# EAGLE board Erika-PCB (EAGLE 9.6.2)
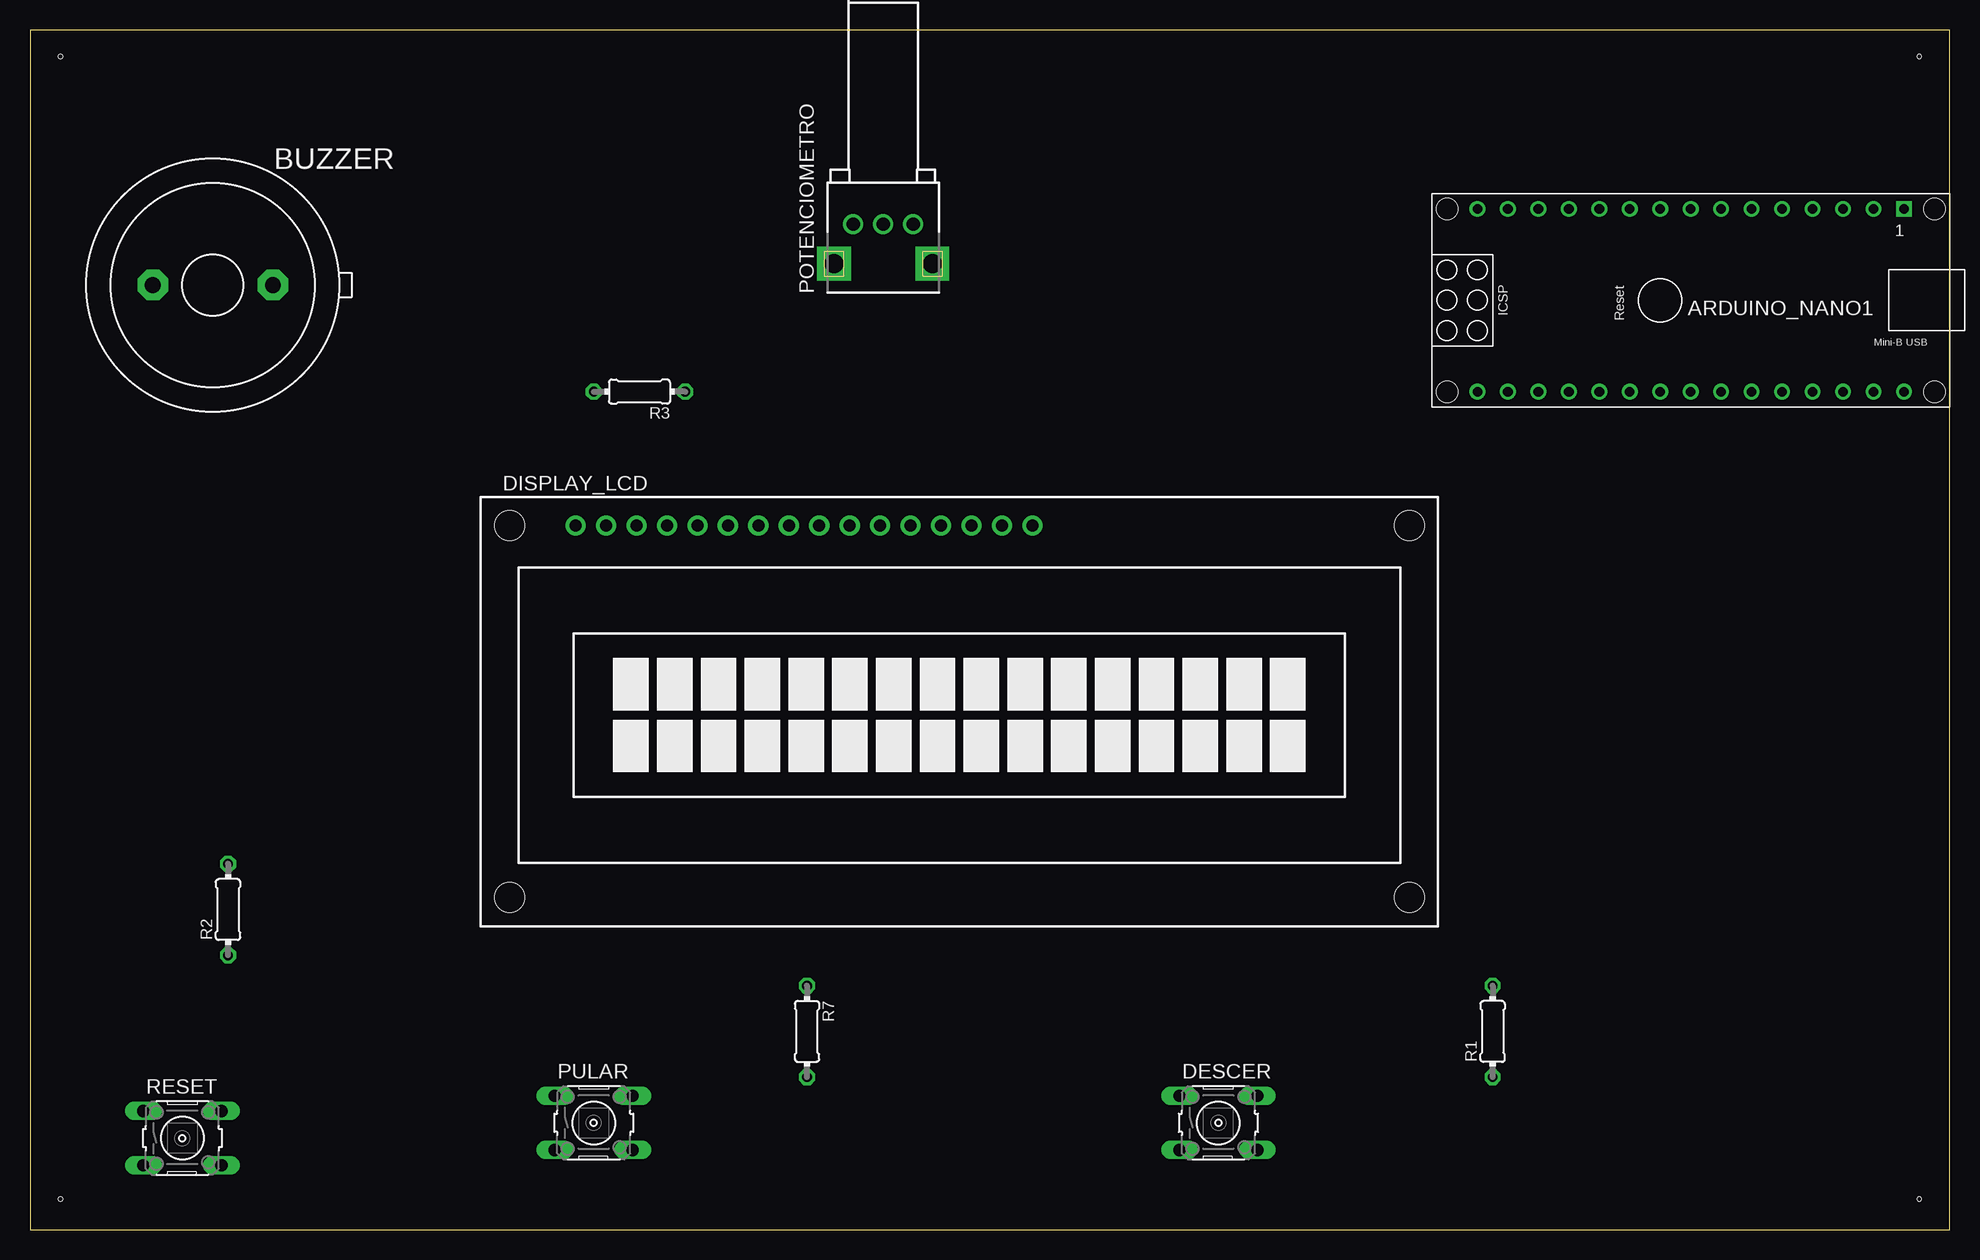
[diagram p0: board, top side]
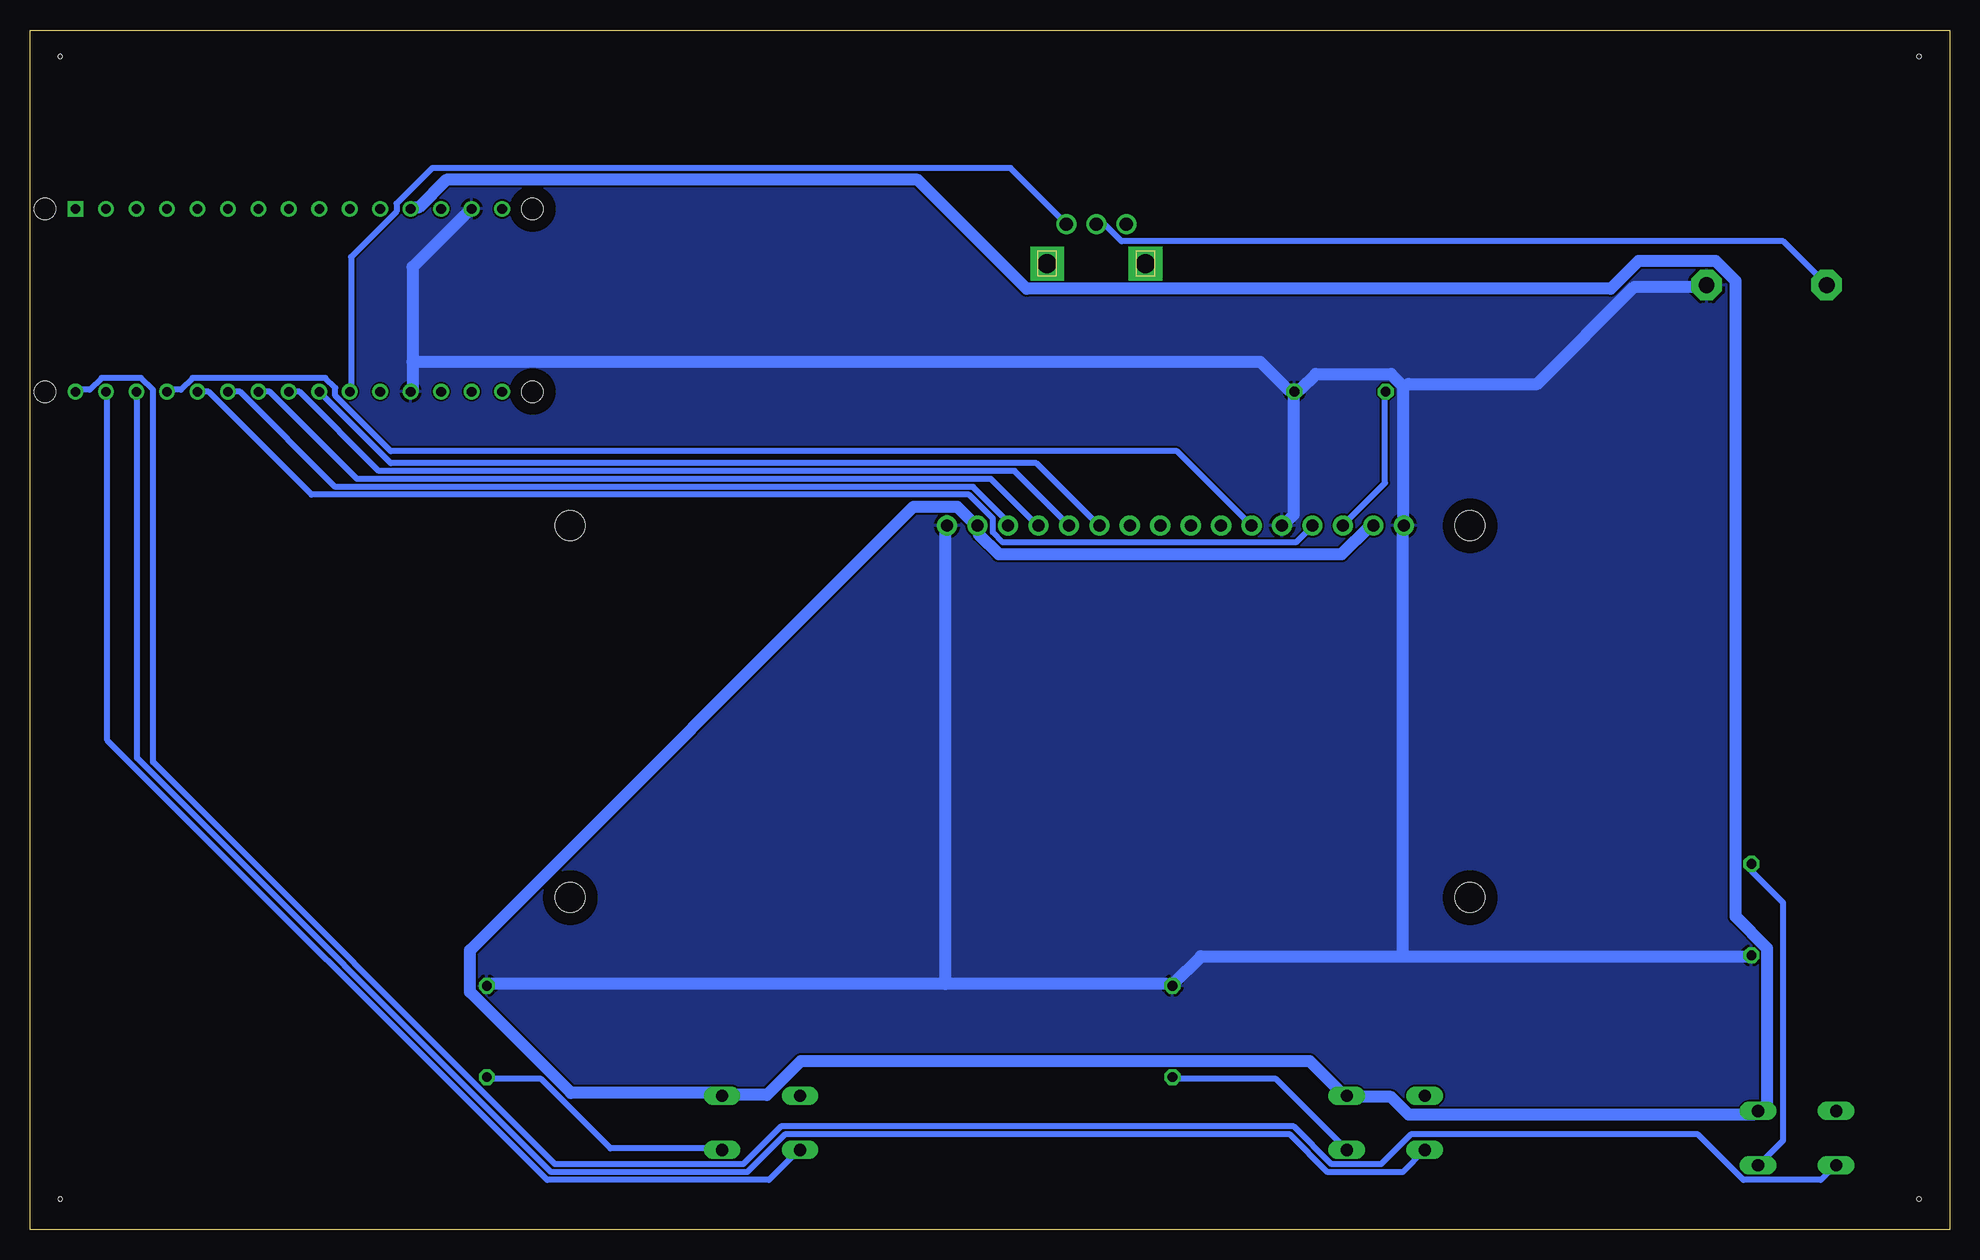
[diagram p1: board, bottom side, seen from below]

Size 160 x 100 mm. Coordinates in mm from the lower left corner, seen from the top.
Outline: 0,0 160,0 160,100 0,100 0,0
Copper layers (1*16): Top 0.035mm / dielectric 1.5mm / Bottom 0.035mm
Design rules "default": minimum track width 6mil, minimum drill 0.35mm, track to track 6mil, track to pad 6mil, pad to pad 6mil, via to via 6mil, smd to smd 6mil, copper to edge 40mil, drill to drill 6mil, minimum pad ring 10mil, minimum via ring 8mil, stop-mask expansion 4mil, vias tented up to drill 0mil, thermal gap 10mil
Net classes: 0 default: width 0.508 mm; 1 alimentação: width 1.016 mm
Holes 0.35 mm at 2.54,97.79 2.54,2.54 157.48,2.54 157.48,97.79

## Footprints (pad centres in the part's own frame; a part is rotated, then mirrored left to right if it is on the bottom)
ARDUINO_NANO = drill 0.8 square: 1 -20.32,-7.62 | drill 0.8: 2 -17.78,-7.62; 3 -15.24,-7.62; 4 -12.7,-7.62; 5 -10.16,-7.62; 6 -7.62,-7.62; 7 -5.08,-7.62; 8 -2.54,-7.62; 9 0,-7.62; 10 2.54,-7.62; 11 5.08,-7.62; 12 7.62,-7.62; 13 10.16,-7.62; 14 12.7,-7.62; 15 15.24,-7.62; 16 15.24,7.62; 17 12.7,7.62; 18 10.16,7.62; 19 7.62,7.62; 20 5.08,7.62; 21 2.54,7.62; 22 0,7.62; 23 -2.54,7.62; 24 -5.08,7.62; 25 -7.62,7.62; 26 -10.16,7.62; 27 -12.7,7.62; 28 -15.24,7.62; 29 -17.78,7.62; 30 -20.32,7.62 | hole 1.778: -22.86,-7.62; -22.86,7.62; 17.78,7.62; 17.78,-7.62
F/EE21P = drill 1.321 pad 2.54 octagon: 1 -5.004,0; 2 5.004,0
B3F-10XX = drill 1.016 long: 1 -3.251,2.261; 2 3.251,2.261; 3 -3.251,-2.261; 4 3.251,-2.261
TUXGR_16X2_R2 = drill 1 pad 1.676: 1 -32,15.5; 2 -29.46,15.5; 3 -26.92,15.5; 4 -24.38,15.5; 5 -21.84,15.5; 6 -19.3,15.5; 7 -16.76,15.5; 8 -14.22,15.5; 9 -11.68,15.5; 10 -9.14,15.5; 11 -6.6,15.5; 12 -4.06,15.5; 13 -1.52,15.5; 14 1.02,15.5; 15 3.56,15.5; 16 6.1,15.5 | hole 2.5: -37.5,-15.5; 37.5,-15.5; -37.5,15.5; 37.5,15.5
EVUE = drill 1.1 pad 1.676: 1 0,-2.5; 2 0,0; 3 0,2.5 | drill 1.6 pad 2.8 square: M1 -3.3,4.1; M2 -3.3,-4.1
0204/7 = drill 0.813 octagon: 1 -3.81,0; 2 3.81,0

## Placement (x,y rotation side)
ARDUINO_NANO1  [ARDUINO_NANO]  135.89,77.47 180 top
BUZZER  F/EE21P  [F/EE21P]  15.24,78.74 0 top
DESCER  [B3F-10XX]  99.06,8.89 0 top
DISPLAY_LCD  TUXGR_16X2_R2  [TUXGR_16X2_R2]  77.47,43.18 0 top
POTENCIOMETRO  EVUE2A  [EVUE]  71.12,83.82 90 top
PULAR  [B3F-10XX]  46.99,8.89 0 top
R1  [0204/7]  121.92,16.51 90 top
R2  [0204/7]  16.51,26.67 90 top
R3  [0204/7]  50.8,69.85 180 top
R7  [0204/7]  64.77,16.51 270 top
RESET  [B3F-10XX]  12.7,7.62 0 top

## Library data of the parts
ARDUINO_NANO1 = ArduinoNanoV30
BUZZER = buzzer; OC_FARNELL: unknown; OC_NEWARK: unknown
DESCER PULAR RESET = switch-omron; MPN: B3F-1000; OC_FARNELL: 176432; OC_NEWARK: 36M3542
DISPLAY_LCD = display-lcd; OC_FARNELL: unknown; OC_NEWARK: unknown
POTENCIOMETRO = pot
R1-R3 R7 = rcl; SPICEPREFIX: R

## Nets
GND [alimentação]: ARDUINO_NANO1.14 ARDUINO_NANO1.19 BUZZER.2 DISPLAY_LCD.1 DISPLAY_LCD.5 DISPLAY_LCD.16 R1.2 R2.1 R3.1 R7.1
N$1: ARDUINO_NANO1.22 DISPLAY_LCD.11
N$2: DESCER.4 R1.1
N$3: ARDUINO_NANO1.28 PULAR.3
N$4: ARDUINO_NANO1.29 DESCER.3
N$5: ARDUINO_NANO1.30 RESET.3
N$6: BUZZER.1 POTENCIOMETRO.2
N$7: ARDUINO_NANO1.23 DISPLAY_LCD.12
N$8: R2.2 RESET.4
N$10: PULAR.4 R7.2
N$11: DISPLAY_LCD.3 R3.2
N$12: ARDUINO_NANO1.24 DISPLAY_LCD.13
N$13: ARDUINO_NANO1.25 DISPLAY_LCD.14
N$14: ARDUINO_NANO1.26 DISPLAY_LCD.4
N$15: ARDUINO_NANO1.27 DISPLAY_LCD.6
N$16: ARDUINO_NANO1.21 POTENCIOMETRO.1
VCC [alimentação]: ARDUINO_NANO1.12 DESCER.2 DISPLAY_LCD.2 DISPLAY_LCD.15 PULAR.2 RESET.2
VIN [alimentação]: ARDUINO_NANO1.15

## Tracks (layer width: path | path; a pad name or v marks a point on that pad's centre or on a via)
GND
  Bottom 1.016: 128.12,72.31 128.12,80.24 123.33,85.03 ARDUINO_NANO1.14 | 128.12,72.31 128.12,70 ARDUINO_NANO1.19 | R3.1 54.65,69.84 54.65,59.6 55.47,58.78 DISPLAY_LCD.5 | 45.57,70.33 45.57,58.78 DISPLAY_LCD.1 45.57,58.28 45.57,22.78 | 45.57,70.33 46.56,71.32 52.83,71.32 54.15,70 R3.1 | BUZZER.2 20.31,78.59 26.25,78.59 34.34,70.5 45.07,70.5 45.57,70.33 | 128.12,72.31 57.45,72.31 55.14,70 R3.1 | 45.57,22.78 62.41,22.78 64.72,20.47 R7.1 65.22,20.47 83.71,20.47 | 45.57,22.78 16.51,22.78 R2.1 | 83.71,20.47 121.84,20.47 R1.2 | 83.71,20.47 83.71,58.61 DISPLAY_LCD.16
  pour Bottom: 1.27,99.06 1.27,1.27 158.75,1.27 158.75,99.06
N$1
  Bottom 0.508: ARDUINO_NANO1.22 129.93,63.89 76.11,63.89 70.99,58.78 DISPLAY_LCD.11
N$2
  Bottom 0.508: R1.1 121.84,12.55 117.39,12.55 111.61,6.77 102.36,6.77 DESCER.4
N$3
  Bottom 0.508: ARDUINO_NANO1.28 151.07,69.84 151.07,39.29 116.56,4.79 100.22,4.79 97.08,7.92 54.98,7.92 51.84,4.79 45.57,4.79 43.75,6.6 PULAR.3
N$4
  Bottom 0.508: ARDUINO_NANO1.29 153.54,69.84 153.54,40.78 116.89,4.13 98.4,4.13 95.92,6.6 DESCER.3
N$5
  Bottom 0.508: ARDUINO_NANO1.30 156.19,70 155.03,70 154.04,70.99 150.74,70.99 149.75,70 149.75,38.96 116.23,5.45 100.55,5.45 97.41,8.59 54.65,8.59 51.51,5.45 47.38,5.45 44.91,7.92 20.97,7.92 17.17,4.13 10.73,4.13 9.58,5.28 RESET.3
N$6
  Bottom 0.508: POTENCIOMETRO.2 70.99,83.71 70.33,83.71 69.01,82.39 13.87,82.39 10.24,78.75 BUZZER.1
N$7
  Bottom 0.508: ARDUINO_NANO1.23 138.35,69.84 137.53,69.84 130.92,63.23 77.93,63.23 73.47,58.78 DISPLAY_LCD.12
N$8
  Bottom 0.508: R2.2 16.51,29.88 13.87,27.24 13.87,7.43 15.85,5.45 RESET.4
N$10
  Bottom 0.508: R7.2 64.72,12.55 56.13,12.55 50.35,6.77 PULAR.4
N$11
  Bottom 0.508: R3.2 47.05,69.84 47.05,62.24 50.52,58.78 DISPLAY_LCD.3
N$12
  Bottom 0.508: ARDUINO_NANO1.24 140.83,69.84 140,69.84 132.74,62.57 79.91,62.57 76.11,58.78 DISPLAY_LCD.13
N$13
  Bottom 0.508: ARDUINO_NANO1.25 143.47,69.84 142.48,69.84 134.56,61.91 81.39,61.91 78.59,59.11 78.59,58.78 DISPLAY_LCD.14
N$14
  Bottom 0.508: ARDUINO_NANO1.26 145.95,69.84 145.12,69.84 136.54,61.25 81.72,61.25 79.74,59.27 79.74,58.12 78.92,57.29 54.48,57.29 53.16,58.61 DISPLAY_LCD.4
N$15
  Bottom 0.508: ARDUINO_NANO1.27 148.59,70 147.43,70 146.44,70.99 135.38,70.99 134.56,70.17 134.56,69.51 129.93,64.88 64.39,64.88 58.28,58.78 DISPLAY_LCD.6
N$16
  Bottom 0.508: ARDUINO_NANO1.21 133.24,70 133.24,81.06 129.44,84.86 129.44,85.52 126.47,88.49 78.26,88.49 73.64,83.87 POTENCIOMETRO.1
VCC
  Bottom 1.016: DISPLAY_LCD.2 48.04,58.61 48.37,58.61 50.69,56.3 79.25,56.3 80.9,57.95 80.9,58.61 DISPLAY_LCD.15 81.39,58.94 82.72,60.26 86.35,60.26 123.33,23.28 123.33,19.81 114.91,11.39 102.69,11.39 DESCER.2 102.2,11.23 98.56,11.23 95.76,14.03 53.33,14.03 50.69,11.39 PULAR.2 50.19,11.06 46.56,11.06 45.07,9.58 16.34,9.58 RESET.2 15.85,9.91 15.19,10.57 15.19,23.44 17.83,26.09 17.83,79.08 19.48,80.73 25.92,80.73 28.23,78.42 76.94,78.42 86.02,87.5 125.31,87.5 127.62,85.19 128.12,85.19 ARDUINO_NANO1.12